# EAGLE board hirose_omnetics_adapter_schematic_rev6 (EAGLE 7.2.0)
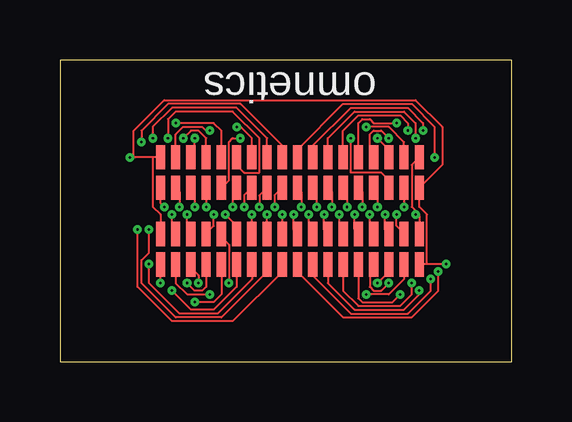
[diagram p0: board, top side]
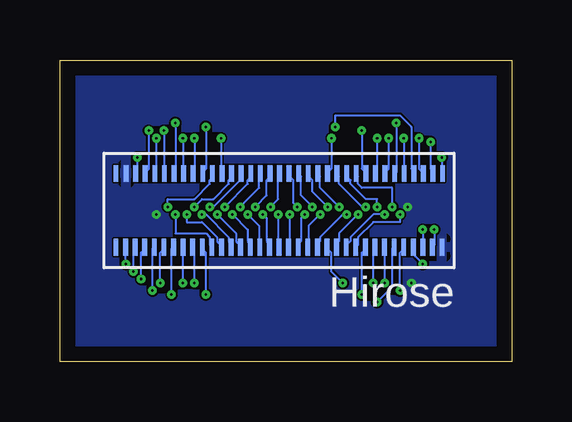
[diagram p1: board, bottom side, seen from below]

Size 18.85 x 12.56 mm. Coordinates in mm from the lower left corner, seen from the top.
Outline: 0,0 18.85,0 18.85,12.56 0,12.56 0,0
Copper layers (1*16): Top 0.035mm / dielectric 1.5mm / Bottom 0.035mm
Design rules "hirose_64ch_adapter_board_DesignRules *": minimum track width 3mil, minimum drill 4mil, track to track 3mil, track to pad 3mil, pad to pad 3mil, via to via 3mil, smd to smd 3mil, copper to edge 25mil, drill to drill 5mil, minimum pad ring 8mil, minimum via ring 5mil, stop-mask expansion 4mil, vias tented up to drill 5mil, thermal gap 10mil

## Footprints (pad centres in the part's own frame; a part is rotated, then mirrored left to right if it is on the bottom)
HIROSE_DF40C-70DS = smd 0.2 x 0.7: P$1 0,0; P$2 -0.4,0; P$3 -0.8,0; P$4 -1.2,0; P$5 -1.6,0; P$6 -2,0; P$7 -2.4,0; P$8 -2.8,0; P$9 -3.2,0; P$10 -3.6,0; P$11 -4,0; P$12 -4.4,0; P$13 -4.8,0; P$14 -5.2,0; P$15 -5.6,0; P$16 -6,0; P$17 -6.4,0; P$18 -6.8,0; P$19 -7.2,0; P$20 -7.6,0; P$21 -8,0; P$22 -8.4,0; P$23 -8.8,0; P$24 -9.2,0; P$25 -9.6,0; P$26 -10,0; P$27 -10.4,0; P$28 -10.8,0; P$29 -11.2,0; P$30 -11.6,0; P$31 -12,0; P$32 -12.4,0; P$33 -12.8,0; P$34 -13.2,0; P$35 -13.6,0; P$36 0,-3.08; P$37 -0.42,-3.08; P$38 -0.82,-3.08; P$39 -1.22,-3.08; P$40 -1.62,-3.08; P$41 -2.02,-3.08; P$42 -2.42,-3.08; P$43 -2.82,-3.08; P$44 -3.22,-3.08; P$45 -3.62,-3.08; P$46 -4.02,-3.08; P$47 -4.42,-3.08; P$48 -4.82,-3.08; P$49 -5.22,-3.08; P$50 -5.62,-3.08; P$51 -6.02,-3.08; P$52 -6.42,-3.08; P$53 -6.82,-3.08; P$54 -7.22,-3.08; P$55 -7.62,-3.08; P$56 -8.02,-3.08; P$57 -8.42,-3.08; P$58 -8.82,-3.08; P$59 -9.22,-3.08; P$60 -9.62,-3.08; P$61 -10.02,-3.08; P$62 -10.42,-3.08; P$63 -10.82,-3.08; P$64 -11.22,-3.08; P$65 -11.62,-3.08; P$66 -12.02,-3.08; P$67 -12.42,-3.08; P$68 -12.82,-3.08; P$69 -13.22,-3.08; P$70 -13.62,-3.08
OMNETICS_A79026-001 = smd 0.381 x 1.016: P$1 0,0; P$2 -0.635,0; P$3 -1.27,0; P$4 -1.905,0; P$5 -2.54,0; P$6 -3.175,0; P$7 -3.81,0; P$8 -4.445,0; P$9 -5.08,0; P$10 -5.715,0; P$11 -6.35,0; P$12 -6.985,0; P$13 -7.62,0; P$14 -8.255,0; P$15 -8.89,0; P$16 -9.525,0; P$17 -10.16,0; P$18 -10.795,0; P$19 0,-1.27; P$20 -0.635,-1.27; P$21 -1.27,-1.27; P$22 -1.905,-1.27; P$23 -2.54,-1.27; P$24 -3.175,-1.27; P$25 -3.81,-1.27; P$26 -4.445,-1.27; P$27 -5.08,-1.27; P$28 -5.715,-1.27; P$29 -6.35,-1.27; P$30 -6.985,-1.27; P$31 -7.62,-1.27; P$32 -8.255,-1.27; P$33 -8.89,-1.27; P$34 -9.525,-1.27; P$35 -10.16,-1.27; P$36 -10.795,-1.27

## Placement (x,y rotation side)
U$1  HIROSE_DF40_70PIN  [HIROSE_DF40C-70DS]  16.51,4.76 180 bottom
U$2  OMNETICS_A79026  [OMNETICS_A79026-001]  14.99,8.51 0 top
U$3  OMNETICS_A79026  [OMNETICS_A79026-001]  14.99,5.31 0 top

## Library data of the parts
U$1 = GG_hirose70
U$2 U$3 = Omnetics_A79026-001

## Nets
A0: U$1.P$69 U$2.P$10
A1: U$1.P$68 U$2.P$11
A2: U$1.P$67 U$2.P$12
A3: U$1.P$66 U$2.P$13
A4: U$1.P$65 U$2.P$14
A5: U$1.P$64 U$2.P$15
A6: U$1.P$63 U$2.P$16
A7: U$1.P$62 U$2.P$17
B0: U$1.P$38 U$2.P$9
B1: U$1.P$39 U$2.P$8
B2: U$1.P$40 U$2.P$7
B3: U$1.P$41 U$2.P$6
B4: U$1.P$42 U$2.P$5
B5: U$1.P$43 U$2.P$4
B6: U$1.P$44 U$2.P$3
B7: U$1.P$45 U$2.P$2
C0: U$1.P$34 U$3.P$28
C1: U$1.P$33 U$3.P$29
C2: U$1.P$32 U$3.P$30
C3: U$1.P$31 U$3.P$31
C4: U$1.P$30 U$3.P$32
C5: U$1.P$29 U$3.P$33
C6: U$1.P$28 U$3.P$34
C7: U$1.P$27 U$3.P$35
D0: U$1.P$3 U$3.P$27
D1: U$1.P$4 U$3.P$26
D2: U$1.P$5 U$3.P$25
D3: U$1.P$6 U$3.P$24
D4: U$1.P$7 U$3.P$23
D5: U$1.P$8 U$3.P$22
D6: U$1.P$9 U$3.P$21
D7: U$1.P$10 U$3.P$20
GND: U$1.P$35 U$1.P$37 U$2.P$1 U$2.P$36 U$3.P$1 U$3.P$36
N$1: U$1.P$61 U$2.P$35
N$2: U$1.P$2 U$1.P$70 U$2.P$18 U$2.P$19 U$3.P$18 U$3.P$19
N$3: U$1.P$60 U$2.P$34
N$4: U$1.P$59 U$2.P$33
N$5: U$1.P$58 U$2.P$32
N$6: U$1.P$57 U$2.P$31
N$7: U$1.P$56 U$2.P$30
N$8: U$1.P$55 U$2.P$29
N$9: U$1.P$54 U$2.P$28
N$10: U$1.P$53 U$2.P$27
N$11: U$1.P$52 U$2.P$26
N$12: U$1.P$51 U$2.P$25
N$13: U$1.P$50 U$2.P$24
N$14: U$1.P$49 U$2.P$23
N$15: U$1.P$48 U$2.P$22
N$16: U$1.P$47 U$2.P$21
N$17: U$1.P$46 U$2.P$20
N$18: U$1.P$26 U$3.P$17
N$19: U$1.P$25 U$3.P$16
N$20: U$1.P$24 U$3.P$15
N$21: U$1.P$23 U$3.P$14
N$22: U$1.P$22 U$3.P$13
N$23: U$1.P$21 U$3.P$12
N$24: U$1.P$20 U$3.P$11
N$25: U$1.P$19 U$3.P$10
N$26: U$1.P$18 U$3.P$9
N$27: U$1.P$17 U$3.P$8
N$28: U$1.P$16 U$3.P$7
N$29: U$1.P$15 U$3.P$6
N$30: U$1.P$14 U$3.P$5
N$31: U$1.P$13 U$3.P$4
N$32: U$1.P$12 U$3.P$3
N$33: U$1.P$11 U$3.P$2

## Tracks (layer width: path | path; a pad name or v marks a point on that pad's centre or on a via)
A0  (via drill 0.1)
  Top 0.076: v3.4,9.14 3.4,9.62 4.51,10.73 7.52,10.73 9.27,8.98 U$2.P$10
  Bottom 0.076: v3.4,9.14 3.4,8.03 3.24,7.87 U$1.P$69
A1  (via drill 0.1)
  Top 0.076: v3.87,9.3 3.87,9.78 4.67,10.57 7.37,10.57 8.64,9.3 U$2.P$11
  Bottom 0.076: v3.87,9.3 3.87,8.03 3.71,7.87 U$1.P$68
A2  (via drill 0.1)
  Top 0.076: v7.37,9.78 7.52,9.78 8,9.3 U$2.P$12
  Bottom 0.076: v7.37,9.78 7.37,10.25 4.67,10.25 4.19,9.78 4.19,8.03 4.03,7.87 U$1.P$67
A3  (via drill 0.1)
  Top 0.076: v4.51,9.3 4.51,10.1 4.83,10.41 7.21,10.41 8.32,9.3 8.32,7.87 7.68,7.87 7.37,8.19 U$2.P$13
  Bottom 0.076: v4.51,9.3 4.51,7.87 U$1.P$66
A4  (via drill 0.1)
  Top 0.076: v4.83,9.94 6.41,9.94 6.73,9.62 U$2.P$14
  Bottom 0.076: v4.83,9.94 4.83,7.87 U$1.P$65
A5  (via drill 0.1)
  Top 0.076: v5.14,9.3 5.46,9.62 5.78,9.62 6.1,9.3 U$2.P$15
  Bottom 0.076: v5.14,9.3 5.14,8.03 5.3,7.87 U$1.P$64
A6  (via drill 0.1)
  Top 0.076: v5.62,9.3 5.62,8.67 U$2.P$16
  Bottom 0.076: v5.62,9.3 5.62,7.87 U$1.P$63
A7  (via drill 0.1)
  Top 0.076: v6.25,9.62 6.1,9.62 5.94,9.78 5.14,9.78 4.83,9.46 U$2.P$17
  Bottom 0.076: v6.25,9.62 6.25,8.03 6.1,7.87 U$1.P$62
B0  (via drill 0.1)
  Top 0.076: v15.62,8.51 15.62,9.78 14.67,10.73 11.81,10.73 9.91,8.83 U$2.P$9
  Bottom 0.076: v15.62,8.51 15.62,7.87 U$1.P$38
B1  (via drill 0.1)
  Top 0.076: v15.14,9.62 15.14,9.94 14.51,10.57 12.13,10.57 10.54,8.98 U$2.P$8
  Bottom 0.076: v15.14,9.62 15.14,8.03 15.3,7.87 U$1.P$39
B2  (via drill 0.1)
  Top 0.076: v14.83,9.3 14.83,9.94 14.35,10.41 12.29,10.41 11.18,9.3 U$2.P$7
  Bottom 0.076: v14.83,9.3 14.83,7.87 U$1.P$40
B3  (via drill 0.1)
  Top 0.076: v14.51,9.62 14.51,9.94 14.19,10.25 12.45,10.25 11.81,9.62 U$2.P$6
  Bottom 0.076: v14.51,9.62 14.51,7.87 U$1.P$41
B4  (via drill 0.1)
  Top 0.076: v14.03,9.94 13.08,9.94 12.92,10.1 12.6,10.1 12.45,9.94 U$2.P$5
  Bottom 0.076: v14.03,9.94 14.03,7.87 U$1.P$42
B5  (via drill 0.1)
  Top 0.076: v13.72,9.3 13.4,9.62 13.08,9.62 12.92,9.46 12.92,8.67 U$2.P$4
  Bottom 0.076: v13.72,9.3 13.72,7.87 U$1.P$43
B6  (via drill 0.1)
  Top 0.076: v13.24,9.3 13.72,8.83 U$2.P$3
  Bottom 0.076: v13.24,9.3 13.24,7.87 U$1.P$44
B7  (via drill 0.1)
  Top 0.076: v12.76,9.78 13.72,9.78 14.35,9.14 U$2.P$2
  Bottom 0.076: v12.76,9.78 12.76,8.03 12.92,7.87 U$1.P$45
C0  (via drill 0.1)
  Top 0.076: v3.24,5.49 3.24,3.11 4.67,1.68 7.21,1.68 9.27,3.75 U$3.P$28
  Bottom 0.076: v3.24,5.49 3.24,4.86 U$1.P$34
C1  (via drill 0.1)
  Top 0.076: v3.71,5.49 3.71,4.54 3.4,4.22 3.4,3.27 4.83,1.84 6.73,1.84 8.64,3.75 U$3.P$29
  Bottom 0.076: v3.71,5.49 3.71,4.86 U$1.P$33
C2  (via drill 0.1)
  Top 0.076: v3.71,4.06 3.71,3.27 4.98,2 6.57,2 8,3.43 U$3.P$30
  Bottom 0.076: v3.71,4.06 4.03,4.38 4.03,4.7 U$1.P$32
C3  (via drill 0.1)
  Top 0.076: v4.67,2.95 5.46,2.16 6.41,2.16 7.37,3.11 U$3.P$31
  Bottom 0.076: v4.67,2.95 4.67,4.54 4.51,4.7 U$1.P$31
C4  (via drill 0.1)
  Top 0.076: v5.62,2.48 6.41,2.48 6.73,2.79 U$3.P$32
  Bottom 0.076: v5.62,2.48 4.98,3.11 4.98,4.7 U$1.P$30
C5  (via drill 0.1)
  Top 0.076: v5.3,3.27 5.62,2.95 5.94,2.95 6.1,3.11 U$3.P$33
  Bottom 0.076: v5.3,3.27 5.3,4.7 U$1.P$29
C6  (via drill 0.1)
  Top 0.076: v5.78,3.27 5.78,3.59 5.46,3.91 U$3.P$34
  Bottom 0.076: v5.78,3.27 5.78,4.7 U$1.P$28
C7  (via drill 0.1)
  Top 0.076: v6.25,2.79 5.3,2.79 4.83,3.27 U$3.P$35
  Bottom 0.076: v6.25,2.79 6.25,4.54 6.1,4.7 U$1.P$27
D0  (via drill 0.1)
  Top 0.076: v15.78,3.75 15.78,2.95 14.67,1.84 11.81,1.84 9.91,3.75 U$3.P$27
  Bottom 0.076: v15.78,3.75 15.78,4.7 U$1.P$3
D1  (via drill 0.1)
  Top 0.076: v15.46,3.43 15.46,2.95 14.51,2 12.13,2 10.54,3.59 U$3.P$26
  Bottom 0.076: v15.46,3.43 15.46,4.54 15.3,4.7 U$1.P$4
D2  (via drill 0.1)
  Top 0.076: v14.99,2.95 14.99,2.79 14.35,2.16 12.29,2.16 11.18,3.27 U$3.P$25
  Bottom 0.076: v14.99,2.95 14.99,4.7 U$1.P$5
D3  (via drill 0.1)
  Top 0.076: v14.67,3.27 14.67,2.79 14.19,2.32 12.45,2.32 11.81,2.95 U$3.P$24
  Bottom 0.076: v14.67,3.27 14.67,4.54 14.51,4.7 U$1.P$6
D4  (via drill 0.1)
  Top 0.076: v14.19,2.79 13.88,2.48 12.6,2.48 12.45,2.63 U$3.P$23
  Bottom 0.076: v14.19,2.79 14.19,4.7 U$1.P$7
D5  (via drill 0.1)
  Top 0.076: v13.72,3.27 13.4,2.95 13.08,2.95 12.92,3.11 12.92,3.75 13.08,3.91 U$3.P$22
  Bottom 0.076: v13.72,3.27 13.72,4.7 U$1.P$8
D6  (via drill 0.1)
  Top 0.076: v13.24,3.27 13.72,3.75 U$3.P$21
  Bottom 0.076: v13.24,3.27 13.24,4.7 U$1.P$9
D7  (via drill 0.1)
  Top 0.076: v12.76,2.79 13.72,2.79 14.35,3.43 U$3.P$20
  Bottom 0.076: v12.76,2.79 12.76,4.54 12.92,4.7 U$1.P$10
GND  (via drill 0.1)
  Top 0.076: 14.99,6.13 U$3.P$1 | 14.99,6.13 14.67,6.45 14.67,8.19 U$2.P$1 | v4.19,3.27 U$3.P$36 | U$2.P$36 4.19,6.6 v4.35,6.45 | v14.83,6.13 14.99,6.13
  pour Bottom: 0,12.57 18.8,12.57 18.8,0.13 0,0.13
N$1  (via drill 0.1)
  Top 0.076: v4.98,6.45 4.98,7.08 U$2.P$35
  Bottom 0.076: v4.98,6.45 4.98,7.24 6.25,7.24 6.41,7.4 6.41,7.71 U$1.P$61
N$2  (via drill 0.1)
  Top 0.076: 15.3,4.06 14.99,4.06 U$3.P$19 | 15.3,4.06 v16.1,4.06 | 15.3,4.06 15.3,6.13 14.99,6.45 U$2.P$19 15.94,8.19 15.94,9.78 14.83,10.89 4.35,10.89 3.08,9.62 3.08,8.51 | U$2.P$18 3.87,8.51 | 3.87,8.51 3.08,8.51 | U$3.P$18 4.19,6.13 3.87,6.45 3.87,8.51 | 3.08,8.51 v2.92,8.51
  Bottom 0.076: v16.1,4.06 16.1,4.7 U$1.P$2 | v2.92,8.51 2.92,7.87 U$1.P$70
N$3  (via drill 0.1)
  Top 0.076: v5.62,6.45 5.62,7.08 U$2.P$34
  Bottom 0.076: v5.62,6.45 5.62,6.76 6.1,6.76 6.73,7.4 6.73,7.56 6.89,7.71 U$1.P$60
N$4  (via drill 0.1)
  Top 0.076: U$2.P$33 v6.1,6.45
  Bottom 0.076: v6.1,6.45 6.25,6.45 7.21,7.4 7.21,7.71 U$1.P$59
N$5  (via drill 0.1)
  Top 0.076: v7.52,9.3 7.21,9.3 7.05,9.14 7.05,7.56 U$2.P$32
  Bottom 0.076: v7.52,9.3 7.52,8.03 7.68,7.87 U$1.P$58
N$6  (via drill 0.1)
  Top 0.076: v7.21,6.45 7.21,7.08 U$2.P$31
  Bottom 0.076: v7.21,6.45 8,7.24 8,7.71 U$1.P$57
N$7  (via drill 0.1)
  Top 0.076: v7.68,6.45 7.68,6.92 U$2.P$30
  Bottom 0.076: v7.68,6.45 8.32,7.08 8.32,7.56 8.48,7.71 U$1.P$56
N$8  (via drill 0.1)
  Top 0.076: v8.32,6.45 8.32,6.92 U$2.P$29
  Bottom 0.076: v8.32,6.45 8.79,6.92 8.79,7.71 U$1.P$55
N$9  (via drill 0.1)
  Top 0.076: v8.95,6.45 8.95,6.92 U$2.P$28
  Bottom 0.076: v8.95,6.45 9.11,6.6 9.11,7.56 9.27,7.71 U$1.P$54
N$10  (via drill 0.1)
  Top 0.076: v10.06,6.45 10.06,7.08 U$2.P$27
  Bottom 0.076: v10.06,6.45 9.75,6.76 9.75,7.71 U$1.P$53
N$11  (via drill 0.1)
  Top 0.076: v10.7,6.45 10.7,7.08 U$2.P$26
  Bottom 0.076: v10.7,6.45 10.22,6.92 10.22,7.56 10.06,7.71 U$1.P$52
N$12  (via drill 0.1)
  Top 0.076: v11.34,6.45 11.34,7.08 U$2.P$25
  Bottom 0.076: v11.34,6.45 10.54,7.24 10.54,7.71 U$1.P$51
N$13  (via drill 0.1)
  Top 0.076: v11.97,6.45 11.97,7.08 U$2.P$24
  Bottom 0.076: v11.97,6.45 11.02,7.4 11.02,7.56 10.86,7.71 U$1.P$50
N$14  (via drill 0.1)
  Top 0.076: v12.6,6.45 12.6,7.08 U$2.P$23
  Bottom 0.076: v12.6,6.45 12.45,6.45 11.34,7.56 11.34,7.71 U$1.P$49
N$15  (via drill 0.1)
  Top 0.076: v13.24,6.45 13.24,7.08 U$2.P$22
  Bottom 0.076: v13.24,6.45 12.92,6.76 12.45,6.76 11.81,7.4 11.81,7.56 11.65,7.71 U$1.P$48
N$16  (via drill 0.1)
  Top 0.076: v12.13,9.3 12.13,7.87 13.4,7.87 13.72,7.56 U$2.P$21
  Bottom 0.076: v12.13,9.3 12.13,7.87 U$1.P$47
N$17  (via drill 0.1)
  Top 0.076: U$2.P$20 v14.35,6.45
  Bottom 0.076: v14.35,6.45 14.35,6.76 13.24,6.76 12.6,7.4 12.6,7.56 12.45,7.71 U$1.P$46
N$18  (via drill 0.1)
  Top 0.076: v4.67,6.13 4.67,5.49 4.83,5.33 U$3.P$17
  Bottom 0.076: v4.67,6.13 4.67,5.81 5.78,5.81 6.41,5.17 6.41,4.86 U$1.P$26
N$19  (via drill 0.1)
  Top 0.076: v5.3,6.13 5.3,5.49 5.46,5.33 U$3.P$16
  Bottom 0.076: v5.3,6.13 5.78,6.13 6.73,5.17 6.73,5.02 6.89,4.86 U$1.P$25
N$20  (via drill 0.1)
  Top 0.076: v6.41,6.13 6.41,5.65 6.1,5.33 U$3.P$15
  Bottom 0.076: v6.41,6.13 7.21,5.33 7.21,5.02 7.37,4.86 U$1.P$24
N$21  (via drill 0.1)
  Top 0.076: v7.05,3.27 7.05,4.86 6.73,5.17 U$3.P$14
  Bottom 0.076: v7.05,3.27 7.52,3.75 7.52,4.54 7.68,4.7 U$1.P$23
N$22  (via drill 0.1)
  Top 0.076: v6.89,6.13 7.37,5.65 U$3.P$13
  Bottom 0.076: v6.89,6.13 7.05,6.13 8,5.17 8,5.02 8.16,4.86 U$1.P$22
N$23  (via drill 0.1)
  Top 0.076: U$3.P$12 v8,6.13
  Bottom 0.076: v8,6.13 8.48,5.65 8.48,4.86 U$1.P$21
N$24  (via drill 0.1)
  Top 0.076: U$3.P$11 v8.64,6.13
  Bottom 0.076: v8.64,6.13 8.79,5.97 8.79,5.02 8.95,4.86 U$1.P$20
N$25  (via drill 0.1)
  Top 0.076: U$3.P$10 v9.27,6.13
  Bottom 0.076: v9.27,6.13 9.27,4.86 U$1.P$19
N$26  (via drill 0.1)
  Top 0.076: v9.75,6.13 9.75,5.49 9.91,5.33 U$3.P$9
  Bottom 0.076: v9.75,6.13 9.75,4.86 U$1.P$18
N$27  (via drill 0.1)
  Top 0.076: v10.38,6.13 10.38,5.49 10.54,5.33 U$3.P$8
  Bottom 0.076: v10.38,6.13 10.22,5.97 10.22,5.02 10.06,4.86 U$1.P$17
N$28  (via drill 0.1)
  Top 0.076: v11.02,6.13 11.02,5.49 11.18,5.33 U$3.P$7
  Bottom 0.076: v11.02,6.13 10.54,5.65 10.54,4.86 U$1.P$16
N$29  (via drill 0.1)
  Top 0.076: v11.65,6.13 11.65,5.49 11.81,5.33 U$3.P$6
  Bottom 0.076: v11.65,6.13 11.02,5.49 11.02,5.02 10.86,4.86 U$1.P$15
N$30  (via drill 0.1)
  Top 0.076: v12.29,6.13 12.29,5.49 12.45,5.33 U$3.P$5
  Bottom 0.076: v12.29,6.13 11.49,5.33 11.49,5.02 11.34,4.86 U$1.P$14
N$31  (via drill 0.1)
  Top 0.076: v12.92,6.13 12.92,5.49 13.08,5.33 U$3.P$4
  Bottom 0.076: v12.92,6.13 12.76,6.13 11.81,5.17 11.81,5.02 11.65,4.86 U$1.P$13
N$32  (via drill 0.1)
  Top 0.076: v13.56,6.13 13.56,5.49 13.72,5.33 U$3.P$3
  Bottom 0.076: v13.56,6.13 13.56,5.81 12.92,5.81 12.29,5.17 12.29,5.02 12.13,4.86 U$1.P$12
N$33  (via drill 0.1)
  Top 0.076: v14.03,6.13 14.03,5.65 14.35,5.33 U$3.P$2
  Bottom 0.076: v14.03,6.13 14.03,5.33 12.76,5.33 12.6,5.17 12.6,4.86 U$1.P$11

## Text on the board
tNames: omnetics